# EAGLE board Pet_BOT_PCB_30pin_ (EAGLE 9.7.0)
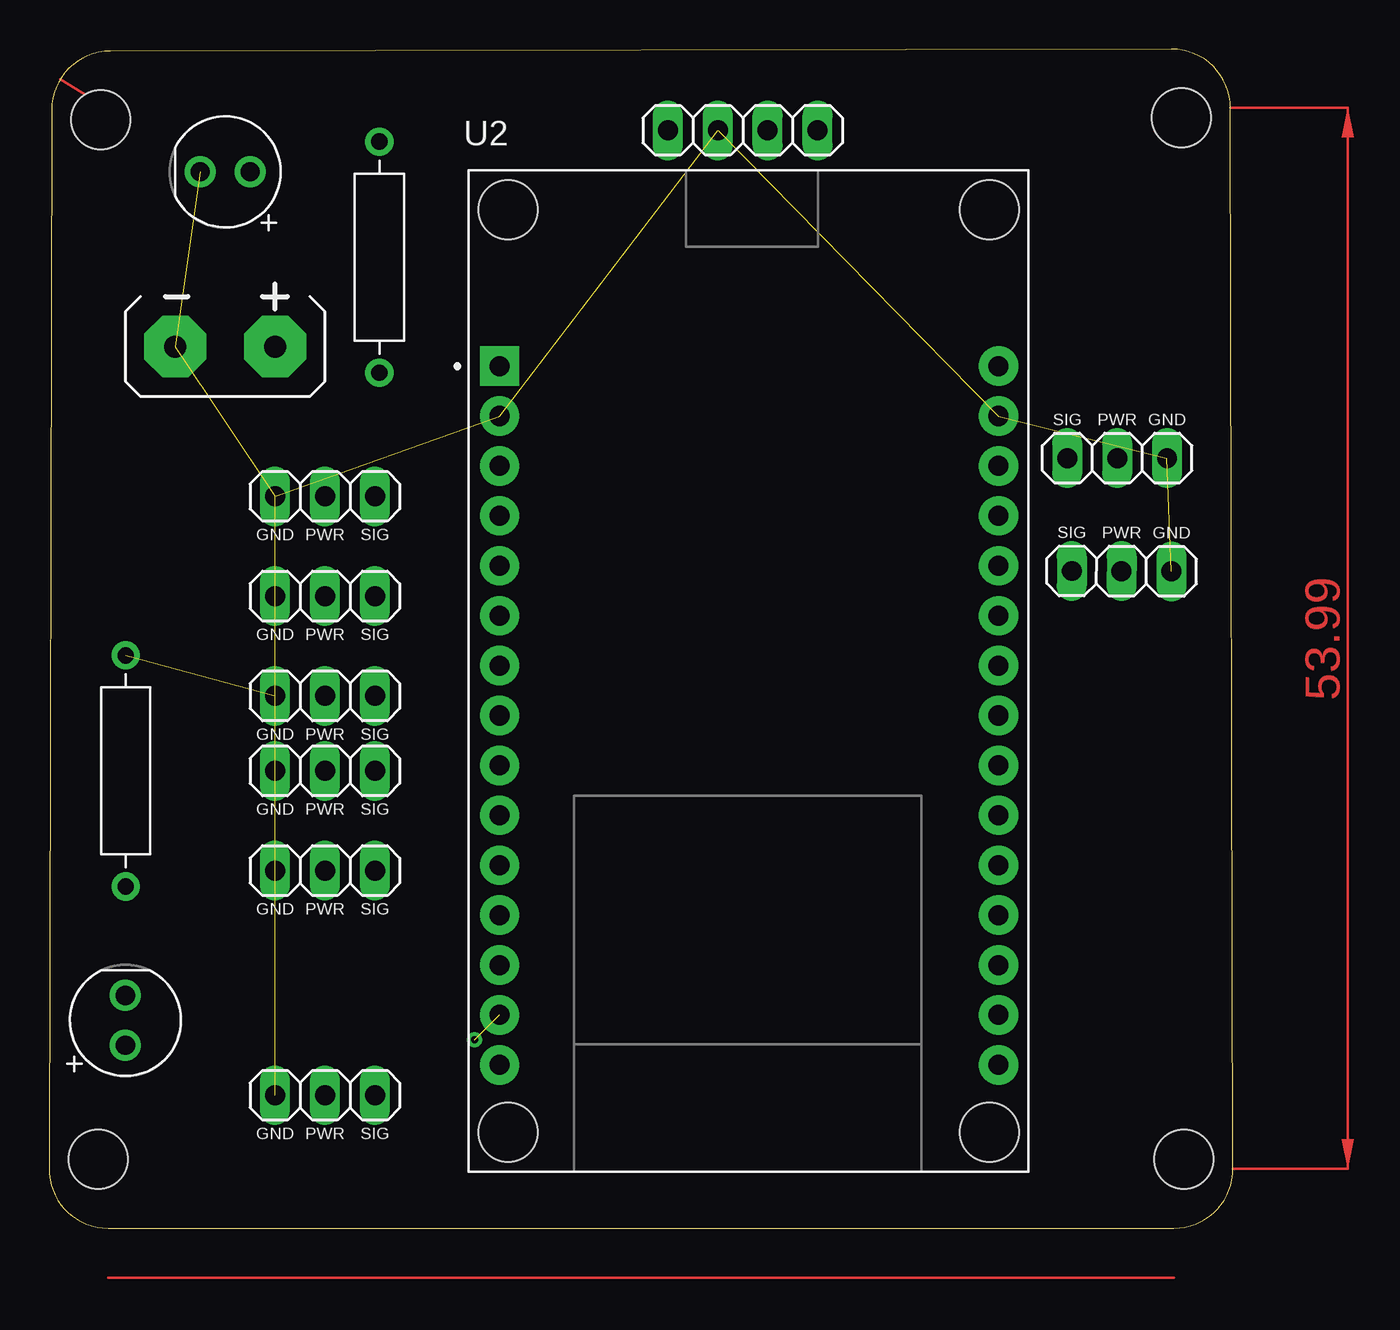
[diagram p0: board, top side]
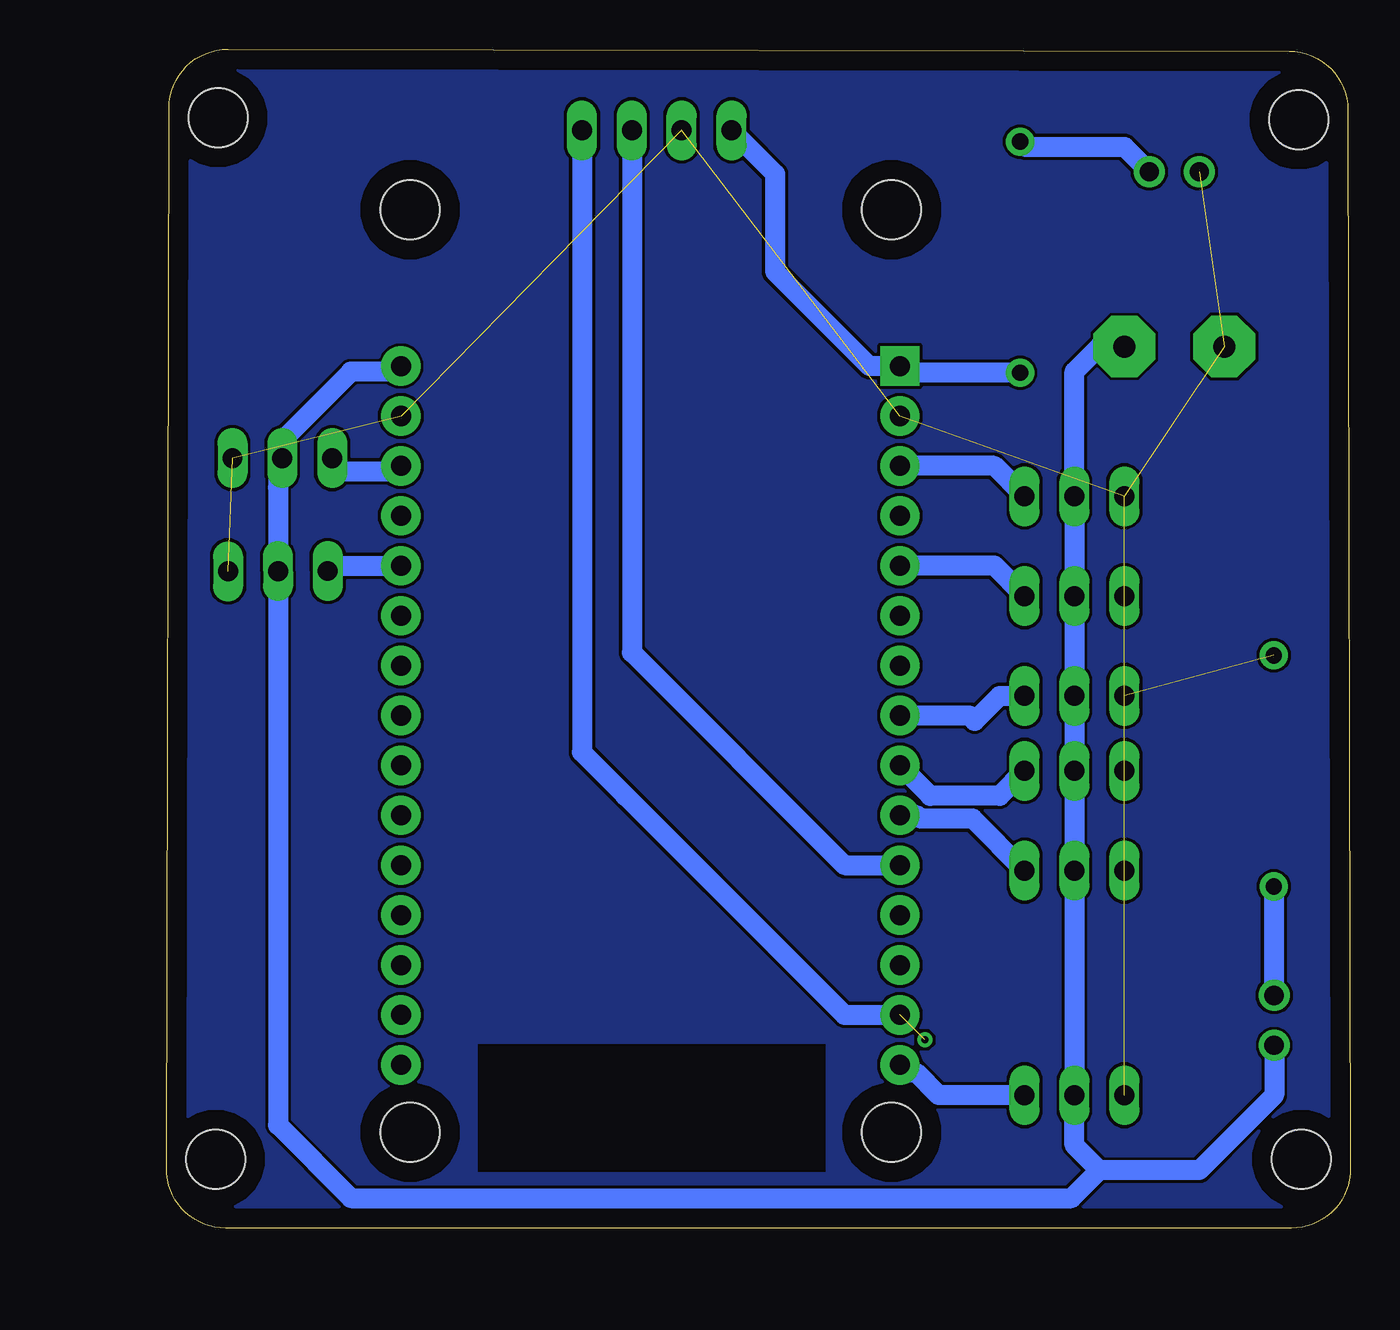
[diagram p1: board, bottom side, seen from below]

Size 60.26 x 59.99 mm. Coordinates in mm from the lower left corner, seen from the top.
Outline: 0,3.01 arc90 3,0 57.26,0 arc90 60.26,3.01 60.14,57 arc90 57.13,59.99 3.12,59.89 arc90 0.12,56.9 0,3.01
Copper layers (1*16): Top / Bottom
Stack-up Default Layer Stack: Top SilkScreen Epoxy Ink / Top SolderMask SR:Green 0.0254mm Dk 4.3 / Top Surface Finish Lead-Free 0.02mm / Top CuFoil:007 0.035mm / Dielectric-1 User Defined 1.5mm / Bottom CuFoil:007 0.035mm / Bottom Surface Finish Lead-Free 0.02mm / Bottom SolderMask SR:Green 0.0254mm Dk 4.3 / Bottom SilkScreen Epoxy Ink
Design rules: minimum copper width 6mil, minimum drill size 0.35mm, copper clearance wire_polygon to wire_polygon 6mil, copper clearance wire_polygon to pad_smd 6mil, copper clearance wire_polygon to via 6mil, copper clearance pad_smd to pad_smd 6mil, copper clearance pad_smd to via 6mil, copper clearance via to via 6mil, copper clearance smd to pad (same net) 6mil, copper clearance smd to via (same net) 6mil, copper clearance smd to smd (same net) 6mil, dimension clearance 40mil, restrict clearance 0mil, via restrict clearance 0mil, drill distance 6mil, keepout clearance 0mil
Holes 3 mm at 2.62,56.39 57.64,56.5 2.5,3.5 57.76,3.5

## Footprints (pad centres in the part's own frame; a part is rotated, then mirrored left to right if it is on the bottom)
LEDRD254W60D565H860B_B = drill 0.981 pad 1.581: A -1.27,0; C 1.27,0
LEDRD254W60D565H860B_R = drill 0.981 pad 1.581: A -1.27,0; C 1.27,0
RESAD1176W63L850D250B = drill 0.83 pad 1.43: 1 -5.88,0; 2 5.88,0
MODULE_ESP32_DEVKIT_V1 = drill 1.02 pad 2 square: 1 -12.7,15.515 | drill 1.02 pad 2: 2 -12.7,12.975; 3 -12.7,10.435; 4 -12.7,7.895; 5 -12.7,5.355; 6 -12.7,2.815; 7 -12.7,0.275; 8 -12.7,-2.265; 9 -12.7,-4.805; 10 -12.7,-7.345; 11 -12.7,-9.885; 12 -12.7,-12.425; 13 -12.7,-14.965; 14 -12.7,-17.505; 15 -12.7,-20.045; 16 12.7,-20.045; 17 12.7,-17.505; 18 12.7,-14.965; 19 12.7,-12.425; 20 12.7,-9.885; 21 12.7,-7.345; 22 12.7,-4.805; 23 12.7,-2.265; 24 12.7,0.275; 25 12.7,2.815; 26 12.7,5.355; 27 12.7,7.895; 28 12.7,10.435; 29 12.7,12.975; 30 12.7,15.515 | hole 3: -12.28,-23.475; 12.23,-23.475; 12.23,23.475; -12.28,23.475
BATTERY-GENERIC = drill 1.118 pad 3.15 octagon: + 2.54,0; - -2.54,0
1X04 = drill 1.016 long: 1 -3.81,0; 2 -1.27,0; 3 1.27,0; 4 3.81,0
SG90 = drill 1.016 long: 1 -2.54,0; 2 0,0; 3 2.54,0

## Placement (x,y rotation side)
D1  LED_RADIALBLUE  [LEDRD254W60D565H860B_B]  8.96,53.75 180 top
D2  LED_RADIALRED  [LEDRD254W60D565H860B_R]  3.88,10.57 90 top
R1  [RESAD1176W63L850D250B]  3.9,23.26 270 top
R2  [RESAD1176W63L850D250B]  16.81,49.41 270 top
U2  ESP32-DEVKIT-V1  [MODULE_ESP32_DEVKIT_V1]  35.63,28.35 0 top
U$1  BATTERY-6VGENERIC  [BATTERY-GENERIC]  8.96,44.86 0 top
U$2  PINHD-1X04_1X04M  [1X04]  35.31,55.86 0 top
U$3  SERVOSG90  [SG90]  54.37,39.18 180 top
U$4  SERVOSG90  [SG90]  54.6,33.43 179.8 top
U$5  SERVOSG90  [SG90]  14.04,18.19 0 top
U$6  SERVOSG90  [SG90]  14.04,6.76 0 top
U$7  SERVOSG90  [SG90]  14.04,37.24 0 top
U$8  SERVOSG90  [SG90]  14.04,23.27 0 top
U$11  SERVOSG90  [SG90]  14.04,32.16 0 top
U$12  SERVOSG90  [SG90]  14.04,27.08 0 top

## Library data of the parts
D1 = Opto-Electronic; CATEGORY: Optoelectronics; COLOR: Blue; DESCRIPTION: Radial LED (Round) 2.54 mm pitch 5.65 mm body diameter 8.60 mm body height Blue; PACKAGE_SIZE: 5mm; PACKAGE_TYPE: Through Hole; SUBCATEGORY: LED; TYPE: Round
D2 = Opto-Electronic; CATEGORY: Optoelectronics; COLOR: Red; DESCRIPTION: Radial LED (Round) 2.54 mm pitch 5.65 mm body diameter 8.60 mm body height Red; PACKAGE_SIZE: 5mm; PACKAGE_TYPE: Through Hole; SUBCATEGORY: LED; TYPE: Round
R1 R2 = Resistor; CATEGORY: Resistors; DESCRIPTION: Axial Resistor 11.76 mm pitch 8.5 mm body length 2.5 mm body diameter; PACKAGE_SIZE: Axial; PACKAGE_TYPE: Through Hole
U2 = ESP32-DEVKIT-V1; AVAILABILITY: Not in stock; CHECK_PRICES: https://www.snapeda.com/parts/ESP32-DEVKIT-V1/Do+it/view-part/?ref=eda; DESCRIPTION: Dual core, Wi-Fi: 2.4 GHz up to 150 Mbits/s,BLE (Bluetooth Low Energy) and legacy Bluetooth, 32 bits, Up to 240 MHz; MF: Do it; MP: ESP32-DEVKIT-V1; PACKAGE: None; PRICE: None; SNAPEDA_LINK: https://www.snapeda.com/parts/ESP32-DEVKIT-V1/Do+it/view-part/?ref=snap
U$1-U$8 U$11 U$12 = Tinkercad

## Nets
N$1: U2.14 U$2.4
N$2: D2.C R1.2
N$3: U2.11 U$2.3
N$4: D1.A R2.1
N$5: R2.2 U2.1 U$2.1
N$8: D1.C R1.1 U2.2 U2.29 U$1.- U$2.2 U$3.1 U$4.1 U$5.1 U$6.1 U$7.1 U$8.1 U$11.1 U$12.1
N$17: U2.5 U$11.3
N$18: U2.8 U$12.3
N$19: U2.28 U$3.3
N$20: U2.26 U$4.3
N$21: U2.3 U$7.3
N$23: U2.10 U$5.3
N$24: U2.15 U$6.3
N$32: U2.9 U$8.3
POWER: D2.A U2.30 U$1.+ U$3.2 U$4.2 U$5.2 U$6.2 U$7.2 U$8.2 U$11.2 U$12.2

## Tracks (layer width: path | path; a pad name or v marks a point on that pad's centre or on a via)
GND
  pour Bottom: 1.34,60.1 58.49,60.1 61.03,57.56 61.03,2.95 59.76,1.68 59.76,-2.13 -1.2,-2.13
N$1  (via drill 0.35)  (1 unrouted)
  Bottom 1.016: U$2.4 39.12,24.22 36.9,22 25.75,10.84 U2.14
  other vias: 21.66,9.57
N$2
  Bottom 1.016: R1.2 3.9,11.86 D2.C
N$3
  Bottom 1.016: U$2.3 36.58,29.3 25.75,18.46 U2.11
N$4
  Bottom 1.016: R2.1 16.54,55.02 11.5,55.02 D1.A
N$5
  Bottom 1.016: R2.2 22.6,43.53 U2.1 24.48,43.86 29.28,48.67 29.28,53.65 U$2.1
N$8  (13 unrouted)
N$17
  Bottom 1.016: U$11.3 18.13,33.7 U2.5
N$18
  Bottom 1.016: U$12.3 17.85,27.08 19.12,25.81 19.4,26.08 U2.8
N$19
  Bottom 1.016: U$3.3 51.83,38.51 48.61,38.51 U2.28
N$20
  Bottom 1.016: U$4.3 51.79,33.7 U2.26
N$21
  Bottom 1.016: U$7.3 18.13,38.78 U2.3
N$23
  Bottom 1.016: U$5.3 19.23,20.83 21.87,20.83 22.05,21 U2.10
N$24
  Bottom 1.016: U2.15 22.53,7.9 22.1,7.9 20.96,6.76 U$6.3
N$32
  Bottom 1.016: U$8.3 17.85,22 21.39,22 U2.9
POWER
  Bottom 1.016: 54.6,38.96 U$3.2 | U2.30 48.61,43.59 50.87,43.59 54.6,39.87 54.6,38.96 | 54.6,38.96 54.6,37.69 U$4.2 54.6,5.25 50.87,1.52 14.2,1.52 12.77,2.95 | D2.A 3.88,6.76 7.69,2.95 11.5,2.95 12.77,2.95 | 12.77,2.95 14.04,4.22 U$6.2 U$5.2 U$8.2 U$12.2 U$11.2 U$7.2 14.04,43.59 12.77,44.86 U$1.+
(copper drawn outside any net)
  shapes: Top area x4